# Altium PCB 遥控3.PcbDoc
Units mm, origin at the board's own origin, x right, y up, seen from the top; angles counter-clockwise.
Board outline 30 x 35 mm, 2 copper layers (Top Layer, Bottom Layer); 29 components, 15 nets, 86 pads, 9 vias.
Unrouted connection lines stored in the file: 22.
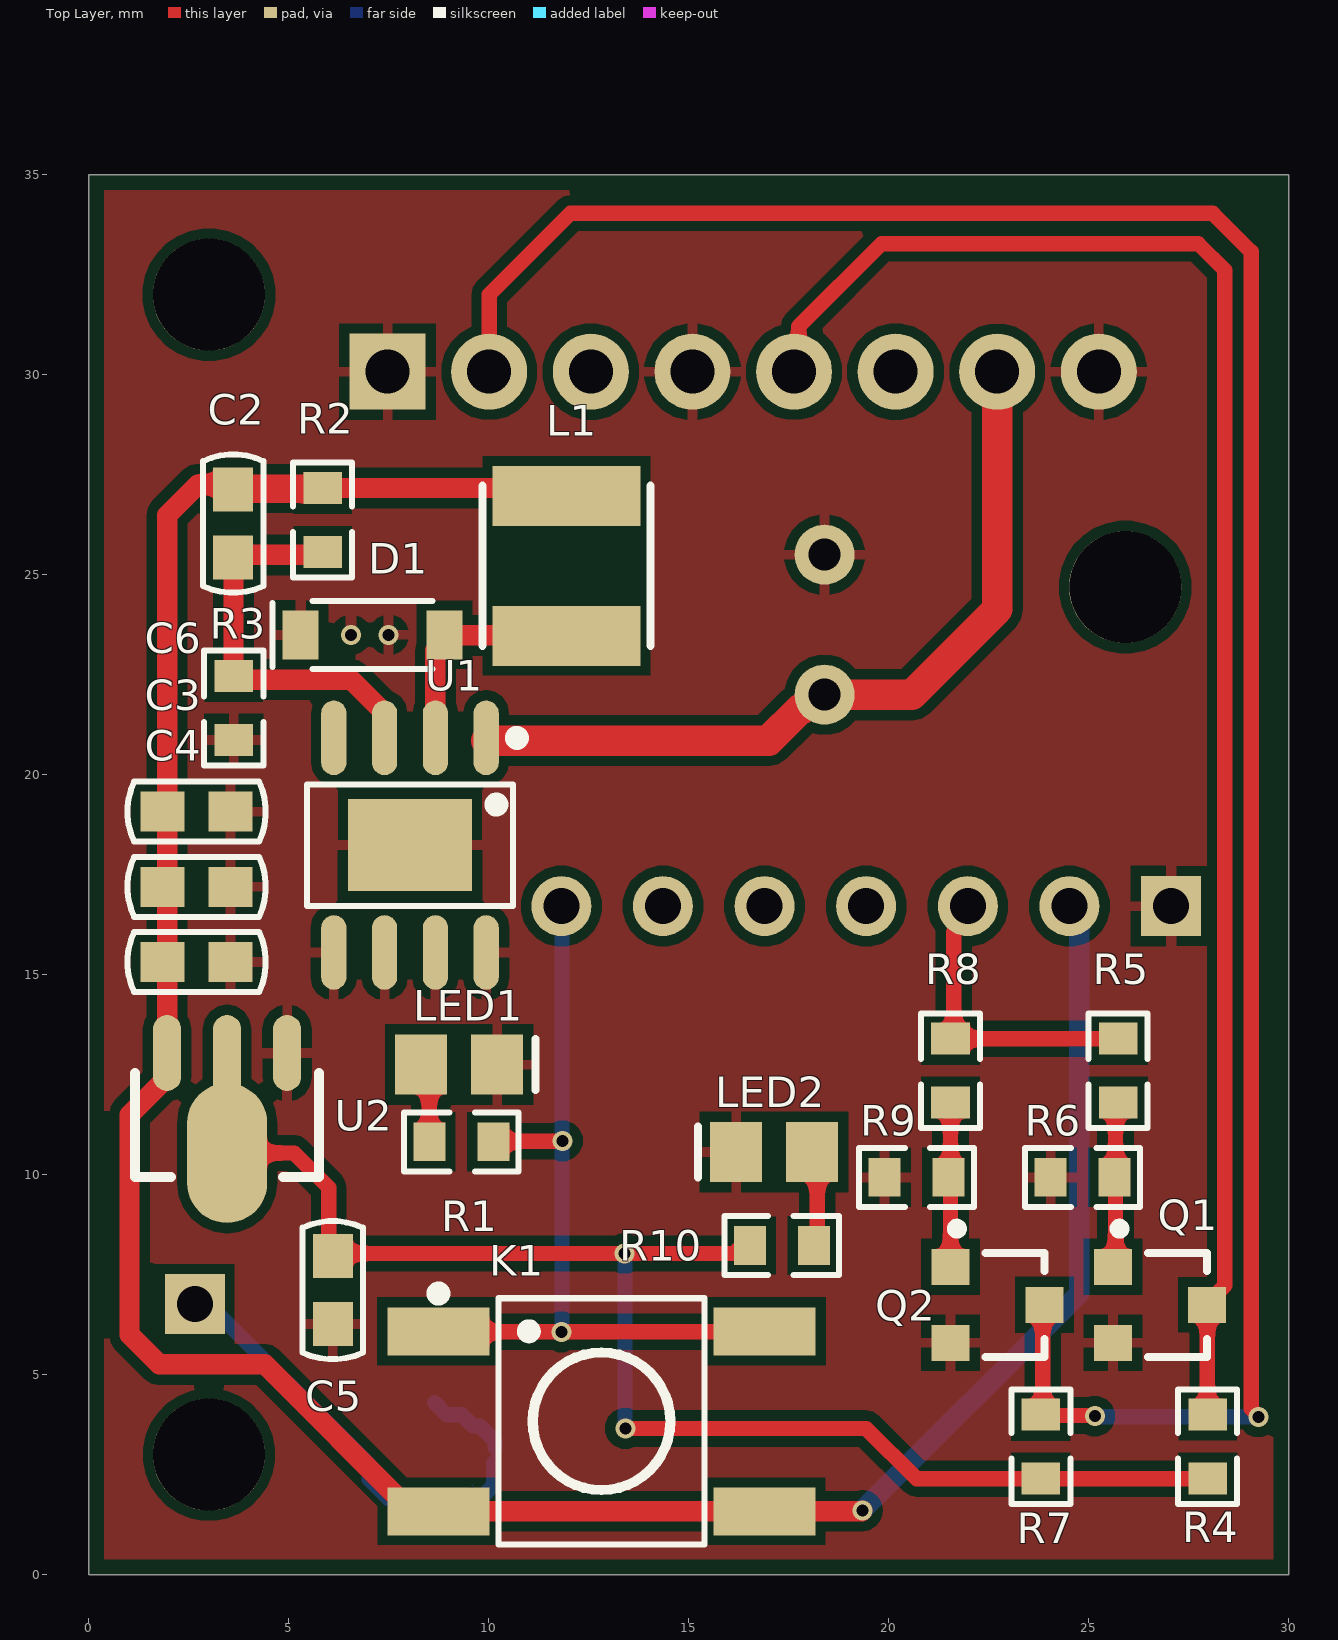
[diagram p0: Top Layer view]
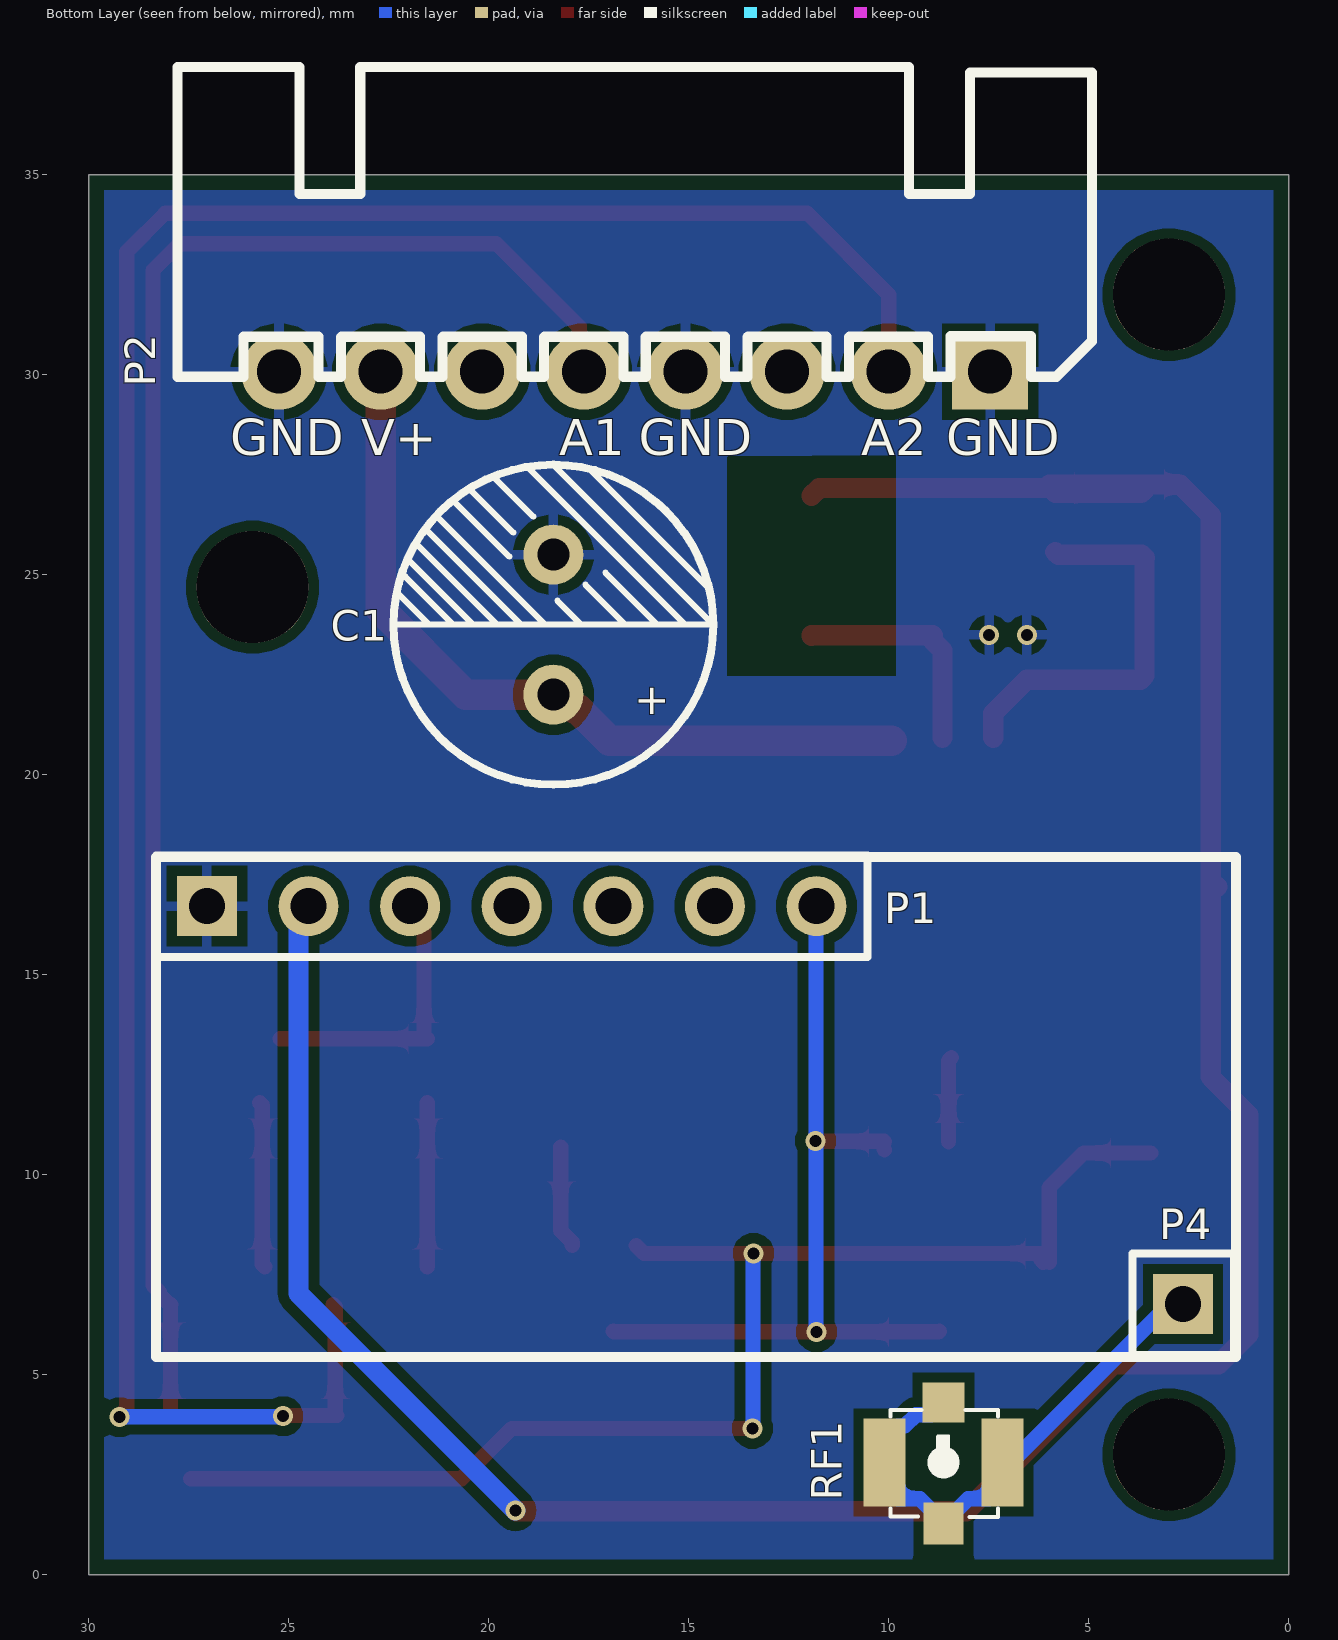
[diagram p1: Bottom Layer view, seen from below]
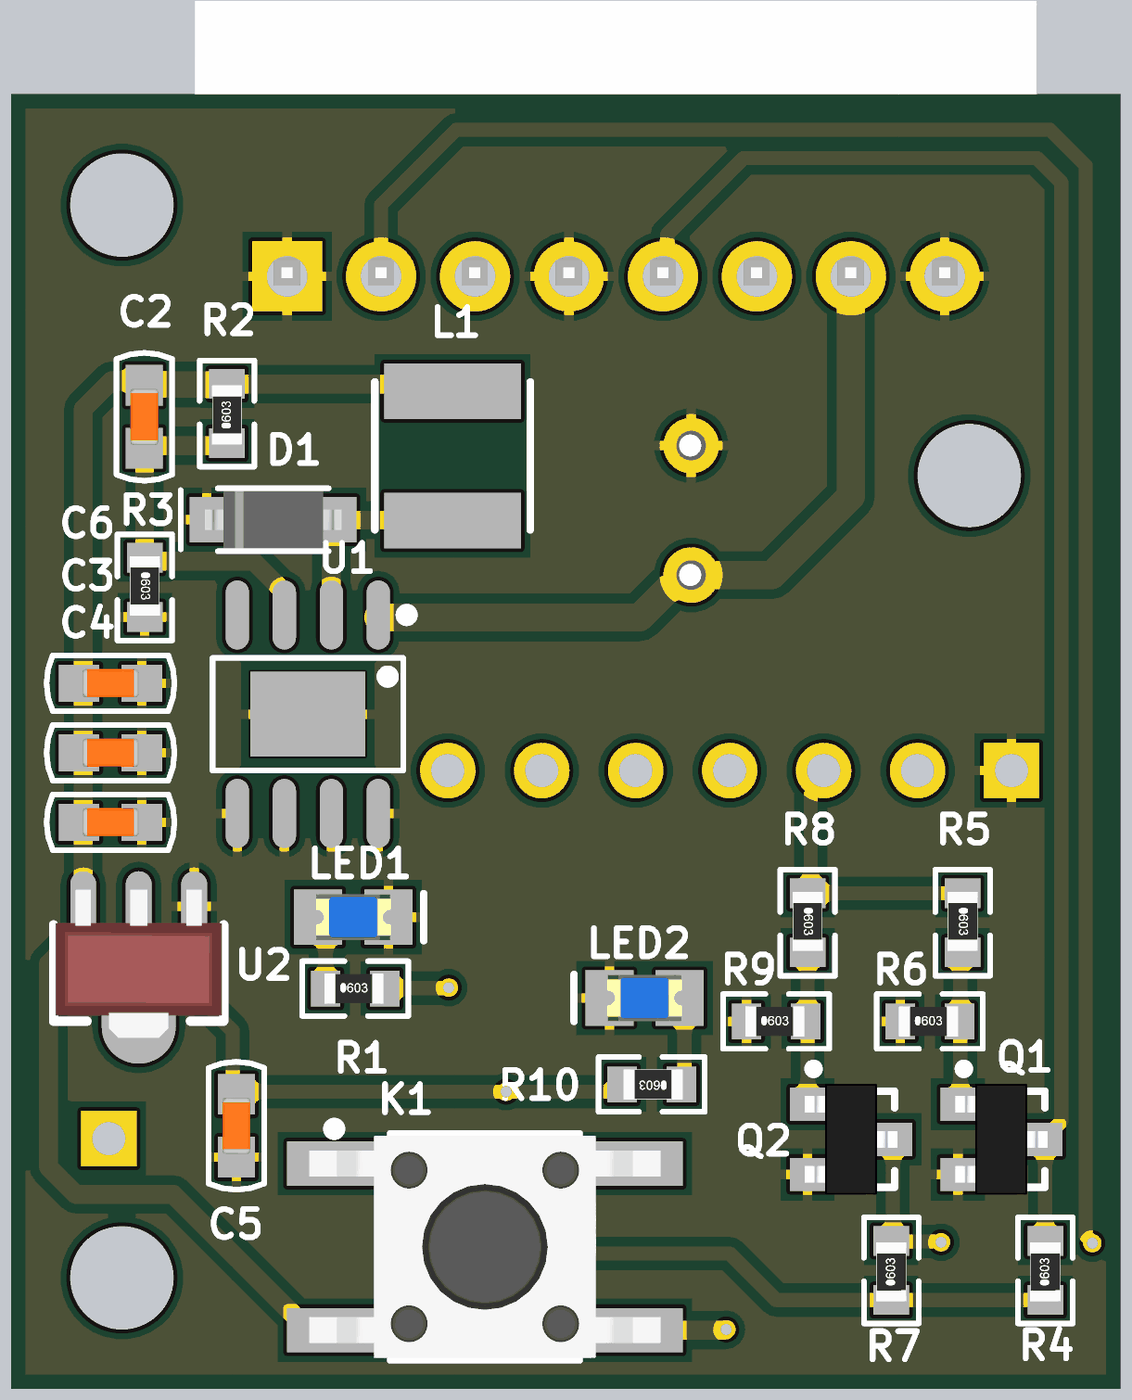
[diagram p2: 3D render of the assembled board from above, using the file's embedded part models]

## Layer stack, top to bottom
Top Solder: solder mask 0.0102, Solder Resist, Dk 3.5
Top Layer: signal copper 0.0356
Dielectric 1: dielectric 0.32, FR-4, Dk 4.8
Bottom Layer: signal copper 0.0356
Bottom Solder: solder mask 0.0102, Solder Resist, Dk 3.5

## Board outline
0,0 0,35 30,35 30,0

## Design rules (kind name [scope] priority, off if disabled: settings)
BoardOutlineClearance [All] p1: gap=0.381 ignorepadtopadclearanceinfootprint=FALSE
Clearance [All] p1: gap=0.254 ignorepadtopadclearanceinfootprint=FALSE except(0: Arc-Hole Track-Hole SMDPad-Hole THPad-Hole Via-Hole Fill-Hole Poly-Hole Region-Hole Text-Hole)
PolygonConnect [All] p1: connectstyle=Relief reliefconductorwidth=0.254 reliefentries=4 polygonreliefangle="90 Angle" airgapwidth=0.254
RoutingVias [All] p1: holewidth=0.3 width=0.5 viastyle="Through Hole" minholewidth=0.3 minwidth=0.5 maxholewidth=0.3 maxwidth=0.5
SolderMaskExpansion [All] p1: expansion=0.102 istentingtop=FALSE
Width [All] p1: maxlimit=0.762 minlimit=0.254 preferedwidth=0.254
30 further rules are at their usual default settings.

## Components (designator, comment, footprint, x,y, rotation, side; value= is the part's Value field where it differs from the comment)
C1 "33uF/100V" 25V330UF-ZC 18.39,23.749 r90 bottom
C2 "33nF" CAP-0603 3.607,26.277 r90 top
C3 "1uF" CAP-0603 2.692,17.196 r180 top
C4 "10uF" CAP-0603 2.692,15.316 r180 top
C5 "10uF" CAP-0603 6.096,7.112 r90 top
C6 "100nF" CAP-0603 2.692,19.075 r180 top
D1 "S210" SOD-123 7.09,23.495 r180 top
K1 "SW-PB" SW-SMD_4P-L6.0-W6.0 12.814,3.835 r0 top locked
L1 "47uH" IND-SMD_L4.0-W4.0_FNR4012S 11.938,25.222 r270 top
LED1 "LED" LED_0805 9.256,12.751 r0 top
LED2 "LED" LED_0805 17.13,10.566 r180 top
P1 "Header 7" HDR1X7 27.051,16.713 r180 bottom
P2 "Header 8" XH2.54-W-8P 16.358,30.074 r0 bottom
P4 "Plug" HEADER_1 2.646,6.763 r0 bottom
Q1 "SS8050" SOT-23 26.778,6.746 r270 top
Q2 "SS8050" SOT-23 22.714,6.746 r270 top
R1 "1K" "0603 - duplicate1" 9.309,10.82 r0 top
R2 "10K" "0603 - duplicate1" 5.842,26.365 r90 top
R3 "3.3K" "0603 - duplicate1" 3.618,21.666 r270 top
R4 "4.7K" "0603 - duplicate1" 27.965,3.2 r90 top value=10K
R5 "1K" "0603 - duplicate1" 25.73,12.598 r270 top value=10K
R6 "10K" "0603 - duplicate1" 24.841,9.931 r0 top
R7 "4.7K" "0603 - duplicate1" 23.8,3.2 r90 top value=10K
R8 "1K" "0603 - duplicate1" 21.539,12.598 r270 top value=10K
R9 "10K" "0603 - duplicate1" 20.688,9.931 r0 top
R10 "1K" "0603 - duplicate1" 17.323,8.23 r180 top
RF1 "6GHz" CONN-SMD_GT-RF1125A-01G 8.636,2.794 r0 bottom
U1 "XL7005A" SOIC-8_L4.9-W3.9-P1.27-LS6.0-BL-EP3.1-1 8.026,18.237 r180 top
U2 "AMS1117-3.3" SOT89 3.454,11.791 r90 top

## Footprints (in the part's own frame and the unit in brackets; to place one, negate y for a bottom-side part, rotate by r counter-clockwise, add the part's x,y. Pads: shape width x height; smd on the part's side, far side on the other; paste and mask are expansions set on the pad)
25V330UF-ZC [mm] "25V330UF-直插电解电容  D=8mm,内径5mm"
  round 1.5 hole 0.8: 1(-1.75,0) 2(1.75,0)
  silkscreen extent -4,-4 4,4, body extent -4,-4.03 4,3.97, height 11.6
"0603 - duplicate1" [mm] "贴片带丝印"
  rect 0.8x0.965 smd: 1(-0.8,0) 2(0.8,0)
  silkscreen extent -1.43,-0.74 1.44,0.74, body extent -0.84,-0.41 0.76,0.41, height 0.45
CAP-0603 [mm] "贴片电容"
  rect 1.1x1 smd: 1(-0.85,0) 2(0.85,0)
  silkscreen extent -1.73,-0.75 1.73,0.75, body extent -0.76,-0.38 0.76,0.38, height 0.78
CONN-SMD_GT-RF1125A-01G [mm]
  rect 1.05x2.2 smd paste+0 mask+0.05: 1(-1.475,-0.012) 3(1.475,-0.012)
  rect 1x1.05 smd paste+0 mask+0.05: 2(0,1.513)
  rect 1.05x1 smd paste+0 mask+0.05: 4(0,-1.513)
  silkscreen extent -1.36,-1.32 1.33,1.35
HDR1X7 [mm] "Connector; Header; 7 Position"
  rect 1.5x1.5 hole 0.9: 1(0,0)
  round 1.5 hole 0.9: 2(2.54,0) 3(5.08,0) 4(7.62,0) 5(10.16,0) 6(12.7,0) 7(15.24,0)
  silkscreen extent -1.27,-1.27 16.51,1.27
HEADER_1 [mm] "2.54排针-3x1"
  rect 1.5x1.5 hole 0.9: 1(0,0)
  silkscreen extent -1.27,-1.27 1.27,1.27
IND-SMD_L4.0-W4.0_FNR4012S [mm]
  rect 1.5x3.7 smd: 1(-1.75,0) 2(1.75,0)
  silkscreen extent -2,-2.1 2,2.1
LED_0805 [mm] "贴片二极管"
  rect 1.3x1.5 smd: 1(-0.95,0) 2(0.95,0)
  silkscreen extent 1.91,-0.64 1.91,0.64, body extent -1.01,-0.62 1.01,0.62, height 1.1
SOD-123 [mm]
  rect 0.91x1.22 smd: 1(-1.8,0) 2(1.8,0)
  silkscreen extent -1.5,-0.85 2.5,0.85, body extent -1.85,-0.77 1.85,0.78, height 1.18
SOIC-8_L4.9-W3.9-P1.27-LS6.0-BL-EP3.1-1 [mm]
  oval 0.63x1.865 smd: 1(-1.905,-2.683) 2(-0.635,-2.683) 3(0.635,-2.683) 4(1.905,-2.683) 5(1.905,2.682) 6(0.635,2.682) 7(-0.635,2.682) 8(-1.905,2.682)
  rect 3.1x2.3 smd paste+0 mask+0.05: 9(0,0)
  silkscreen extent -2.82,-2.83 2.58,1.52
SOT89 [mm] "SOT89封装"
  oval 1.9x0.7 smd: 1(1.25,-1.5) 3(1.25,1.5)
  oval 3.5x2 smd: 2(-1.25,0)
  oval 2.1x0.7 smd: 2(1.151,0)
  silkscreen extent -1.85,-2.3 0.75,2.3, body extent -2.3,-2.25 1.7,2.25, height 1.5
SOT-23 [mm]
  rect 0.9x0.95 smd: 1(-0.95,-1.175) 2(0.95,-1.175) 3(0,1.175)
  silkscreen extent -2.03,-1.14 1.3,1.18, body extent -1.5,-1.25 1.5,1.25, height 1.15
SW-SMD_4P-L6.0-W6.0 [mm]
  rect 2.55x1.2 smd: 1(-4.075,2.25) 1(4.075,2.25) 2(-4.075,-2.25) 2(4.075,-2.25)
  silkscreen extent -4.22,-3.08 2.57,3.34, body extent -4.75,-3 4.75,3, height 7.42
XH2.54-W-8P [mm] "接插件，8P"
  rect 1.9x1.9 hole 1.1: 1(-8.89,0)
  round 1.9 hole 1.1: 2(-6.35,0) 3(-3.81,0) 4(-1.27,0) 5(1.27,0) 6(3.81,0) 7(6.35,0) 8(8.89,0)
  silkscreen extent -11.43,-7.62 11.43,0.13, body extent -11.4,-7.45 11.38,0.25, height 2.89

## Part data
C1: library part 470uF, Manufacturer=ValuePro, Manufacturer Part="470uF 35V 10*15Green high frequency", nameAlias=Capacitance, spicePre=C, spiceSymbolName="470uF 35V 10*15Green high frequency", Supplier=LCSC, Supplier Part=C45081
C2 C3 C4 C5 C6: library part Cap, "无极性电容", LatestRevisionDate=17-Jul-2002, LatestRevisionNote="Re-released for DXP Platform.", PackageReference=RAD-0.3, Published=8-Jun-2000, Publisher="Altium Limited"
D1: library part B340A, LCSC Assembly=Yes, Manufacturer=MDD, image=//image.lceda.cn/szlcsc/C64982.jpg, Manufacturer Part=B340A, SMT Type=Extend, spicePre=D, spiceSymbolName=B340A, Supplier=LCSC, Supplier Part=C64982
K1: "微动开关", LatestRevisionDate=17-Jul-2002, LatestRevisionNote="Re-released for DXP Platform.", PackageReference=SPST-2, Published=24-Mar-1999, Publisher="Altium Limited", Suppliter Part=C961737
L1: library part 68uH, Manufacturer=SXN, Manufacturer Part=SMDRI127-680MT, nameAlias=Inductance, spicePre=L, spiceSymbolName=SMDRI127-680MT, Supplier=LCSC, Supplier Part=C9907
LED1 LED2: "发光二极管", LatestRevisionDate=08-Jul-2005, LatestRevisionNote="Mech Layer 1 removed.", PackageReference=LED-0, Published=8-Jun-2000, Publisher="Altium Limited"
P1: "Header, 7-Pin", LatestRevisionDate=17-Jul-2002, LatestRevisionNote="Re-released for DXP Platform.", Publisher="Altium Limited"
P2: "Header, 8-Pin", LatestRevisionDate=17-Jul-2002, LatestRevisionNote="Re-released for DXP Platform.", Publisher="Altium Limited"
P4: "安装孔", LatestRevisionDate=17-Jul-2002, LatestRevisionNote="Re-released for DXP Platform.", Publisher="Altium Limited"
Q1 Q2: "NPN贴片三极管", PackageDocument=Sep-1998, Code_JEDEC=TO-92A, ComponentLink1Description="Manufacturer Link", ComponentLink1URL=http://www.fairchildsemi.com/, ComponentLink2Description=Datasheet, ComponentLink2URL=http://www.fairchildsemi.com/ds/2N%2F2N3904.pdf, DatasheetDocument=1997, LatestRevisionDate=15-Jan-2003, LatestRevisionNote="PCB Footprint 'BCY-W3/D4.7' replaced", PackageReference=TO-92A, Published=8-Jun-2000, Publisher="Altium Limited"
R1 R4 R5 R6 R7 R8 R9 R10: library part Res, "贴片电阻", LatestRevisionDate=17-Jul-2002, LatestRevisionNote="Re-released for DXP Platform.", PackageReference=AXIAL-0.4, Published=8-Jun-2000, Publisher="Altium Limited"
R2: library part 1K, LCSC Assembly=Yes, Manufacturer=UniOhm, Manufacturer Part=0603WAF1001T5E, nameAlias="Resistance (Ohms)", SMT Type=Basic, spicePre=R, spiceSymbolName=0603WAF1001T5E, Supplier=LCSC, Supplier Part=C21190
R3: library part 3K, LCSC Assembly=Yes, Manufacturer=UniOhm, Manufacturer Part=0603WAF3001T5E, nameAlias="Resistance (Ohms)", SMT Type=Basic, spicePre=R, spiceSymbolName=0603WAF3001T5E, Supplier=LCSC, Supplier Part=C4211
RF1: library part GT-RF1125A-01G, JLCPCB Part Class="Extended Part", LCSC Part Name="内针 IPEX 立贴", Manufacturer=G-Switch(品赞), Operating Temperature Range=-40℃~+90℃, Add into BOM=yes, Connector Type=板端, Convert to PCB=yes, Datasheet=https://atta.szlcsc.com/upload/public/pdf/source/20240806/E29158DC2BBCFBE0FBB4FF318E1913A6.pdf, Device=GT-RF1125A-01G, Impedance=20mΩ, Interface=内针, Interface Diameter=2mm, Interface Length/Height=1.25mm, Manufacturer Part=GT-RF1125A-01G, Number of Ports=1, RF Series=IPEX, Style=立贴, Supplier=LCSC, Supplier Footprint=SMD, Supplier Part=C5299419, Symbol=GT-RF1125A-01G
U1: Frequency - Switching=150kHz, JLCPCB Part Class="Extended Part", LCSC Part Name="0.4A 150kHz 80V 降压型DC-DC转换器", Manufacturer=XLSEMI(芯龙), Operating Temperature=-40℃~+125℃@(TJ), Output Current=400mA, Output Voltage=1.25V~20V, Quiescent Current=2.5mA, Voltage - Supply=5V~80V, Add into BOM=yes, Convert to PCB=yes, Datasheet=https://atta.szlcsc.com/upload/public/pdf/source/20150821/1457707346919.pdf, Device=XL7005A, Function=降压型, Manufacturer Part=XL7005A, Number of Outputs=1, Output Type=可调, Supplier=LCSC, Supplier Footprint=SOIC-8-EP, Supplier Part=C50848, Switch tube (built-in/external)=内置, Symbol=XL7005A, Synchronous Rectifier=否, Topology=降压式
U2: library part AMS1117, "3.3V稳压芯片"

## Free pads (board coordinates)
  round 2.8 hole 2.8 unplated: 0(3,3) 0(3,32) 0(25.908,24.689)

## Via types
v1: diameter 0.5, hole 0.3, Top Layer to Bottom Layer, 9 vias

## Nets (pads, with @x,y where several pads share a name; then routed paths per layer and width w, separated by ;. In a path a pad name is that pad's centre, name@x,y a point inside that pad or via, vN(x,y) a via of type N, cw(c..) or ccw(c..) an arc to the next point about the centre after c; other vN are vias at no path point)
+3.3V: C5.2 R4.1 R7.1 R10.2 U2.2 | length 34
  Top Layer w0.381: U2.2@3.454,10.541 5.131,10.541 5.994,9.677 5.994,8.032 C5.2@5.994,7.813 ; C5.2 6.166,8.032 v1(13.386,8.032) 16.122,8.032 R10.2@16.32,8.23 ; C5.2@6.152,7.813 6.152,7.823 C5.2@6.193,7.865 ; v1(13.411,3.658) 19.431,3.658 20.688,2.4 23.292,2.4 27.457,2.4
  Bottom Layer w0.381: v1@13.386,7.925 13.399,7.912 13.399,3.67 v1(13.411,3.658)
+5V: C2.2 C3.2 C4.2 C6.2 K1.2 L1.1 P1.2 R2.2 U2.3 | length 71.3
  Top Layer w0.508: C3.2@1.792,17.196 C3.2 ; C2.2 3.684,27.05 R2.2@5.842,27.05 ; R2.2 11.745,27.165 L1.1 ; R2.2@5.994,27.254 2.718,27.254 1.954,26.491 1.954,15.992 U2.3 1.954,12.44 1.016,11.502 1.016,5.994 1.753,5.258 4.392,5.258 8.064,1.585 8.739,1.585 16.889,1.585 19.318,1.585 v1(19.338,1.605)
  Bottom Layer w0.508: v1(19.338,1.605) 24.761,7.028 P1.2@24.761,16.808
A1: P2.5 Q1.3 R4.2 | length 41.8
  Top Layer w0.381: P2.5 17.744,30.19 17.744,31.206 19.812,33.274 27.733,33.274 28.397,32.61 28.397,7.229 28.238,7.069 28.238,7.006 27.978,6.746 Q1.3 27.959,6.74 27.959,4.007 R4.2
A2: P2.2 Q2.3 R7.2 | length 59.7
  Top Layer w0.381: P2.2 10.008,32.004 12.04,34.036 28.092,34.036 29.058,33.071 29.058,4.147 29.235,3.969 v1(29.235,3.937) ; Q2.3 23.844,6.701 23.844,4.026 23.8,3.981 25.127,3.981 v1(25.146,3.962)
  Bottom Layer w0.381: v1@25.178,3.962 25.191,3.95 29.223,3.95 v1(29.235,3.937)
ANT: P4.1 RF1.1 RF1.2 RF1.3 RF1.4 | length 12.8
  Bottom Layer w0.381: P4.1@2.896,6.858 7.01,2.743 7.01,2.382 7.496,1.897 8.02,1.897 8.301,1.616 8.327,1.616 RF1.2@8.636,1.306 ; RF1.2 RF1.2@8.636,1.306 ; RF1.4 8.946,3.997 9.326,3.997 9.607,3.716 9.776,3.716 10.149,3.344 RF1.3@10.149,3.174 ; RF1.3 10.111,2.232 9.776,1.897 9.227,1.897 RF1.2@8.636,1.306
D0_5V: P1.3 R5.1 R8.1 | length 7.2
  Top Layer w0.381: R8.1 R8.1@21.622,13.398 ; P1.3 21.971,16.41 21.622,16.061 R8.1@21.622,13.398 ; P1.3@22.221,16.713 P1.3@22.221,16.808 ; 25.222,13.398 R8.1@21.622,13.398
GND: C1.2 C3.1 C4.1 C5.1 C6.1 D1.2 LED1.2 LED2.2 P1.1 P2.1 P2.4 P2.8 Q1.2 Q2.2 R3.2 R6.1 R9.1 U1.5 U1.6 U1.7 U1.8 U1.9 U2.1
  other v1: 6.553,23.495 7.493,23.495
NetC2_1: C2.1 R2.1 R3.1 U1.3 | length 10
  Top Layer w0.508: R2.1 5.773,25.496 3.676,25.496 C2.1 3.613,25.421 3.613,22.472 R3.1 3.707,22.377 6.552,22.377 7.392,21.537 U1.3
NetD1_1: D1.1 L1.2 U1.2 | length 5.7
  Top Layer w0.508: U1.2 8.662,23.112 8.903,23.353 8.903,23.482 8.901,23.484 11.927,23.484 L1.2
NetLED1_1: LED1.1 R1.1 | length 2.1
  Top Layer w0.381: LED1.1@8.433,12.929 8.509,12.852 R1.1
NetLED2_1: LED2.1 R10.1 | length 2.6
  Top Layer w0.381: R10.1@17.92,8.23 17.92,8.312 18.207,8.599 LED2.1@18.207,10.693
NetQ1_1: Q1.1 R5.2 R6.2 | length 4.2
  Top Layer w0.381: Q1.1 25.667,7.76 25.667,11.735 R5.2
NetQ2_1: Q2.1 R8.2 R9.2 | length 4.1
  Top Layer w0.381: Q2.1 R8.2
V+: C1.1 P2.7 U1.1 | length 20.1
  Top Layer w0.762: U1.1@9.932,20.853 16.99,20.853 17.767,21.63 17.821,21.63 18.136,21.945 18.136,21.999 C1.1 20.577,21.999 22.708,24.13 P2.7
VT: K1.1 P1.7 R1.2 | length 20.5
  Top Layer w0.381: K1.1@8.739,6.085 8.754,6.071 16.875,6.071 K1.1@16.889,6.085 ; R1.2@10.109,10.617 R1.2@10.122,10.63 ; R1.2 10.122,10.833 11.824,10.833 v1(11.836,10.846)
  Bottom Layer w0.381: v1(11.811,6.071) 11.824,6.083 11.824,10.801 v1@11.836,10.814 ; P1.7 11.824,16.7 11.824,10.858 v1(11.836,10.846)
pads on no net: P1.4 P1.5 P1.6 P2.3 P2.6 U1.4

## Polygon pours and split planes (outlines as drawn)
GND on Bottom Layer "GND_L02_P000" (solid, remove dead copper, pour order 0): 0,0 30,0 30,35 0,35
GND on Top Layer "GND_L01_P001" (solid, remove dead copper, pour order 1): -0.157,-0.152 30,-0.152 30,35 0,35

## Other copper
Top Layer:
  pour cut-out: 9.834,27.976 9.834,22.468 14.042,22.468 14.042,27.976
Bottom Layer:
  pour cut-out: 9.83,27.991 9.83,22.479 14.046,22.479 14.046,27.94 14.021,27.965

## Silkscreen, mask and mechanical layers (free items; w line width, h text height)
Bottom Overlay:
  lines w0.254: 1.321,5.438 1.321,17.938 28.321,17.938 28.321,5.438 1.321,5.438
  text "GND" at 8.562,27.988 h0.9
  text "A2" at 10.696,27.988 h0.9
  text "GND" at 16.258,27.988 h0.9
  text "A1" at 18.24,27.988 h0.9
  text "V+" at 23.193,27.988 h0.9
  text "GND" at 26.469,27.988 h0.9
Mechanical 1:
  the board outline again, w0.508

## Text inside footprints (layer, text, board x,y; h text height)
C1: Bottom Overlay "+" at 15.59,21.399 h0.76 r270